# Altium PCB FMC_SDR.PcbDoc
Units mm, origin at the board's own origin, x right, y up, seen from the top; angles counter-clockwise.
Board outline 138.92 x 69 mm, 6 copper layers (Top Layer, Plane L2 GND, L3 VADJ,signals, L4 5P0V, 3P3V, 3P3VAUX, signals, Plane L5 GND, Bottom Layer), stack 1.46 mm thick; 44 components, 76 nets, 214 pads, 124 vias.
Unrouted connection lines stored in the file: 46.
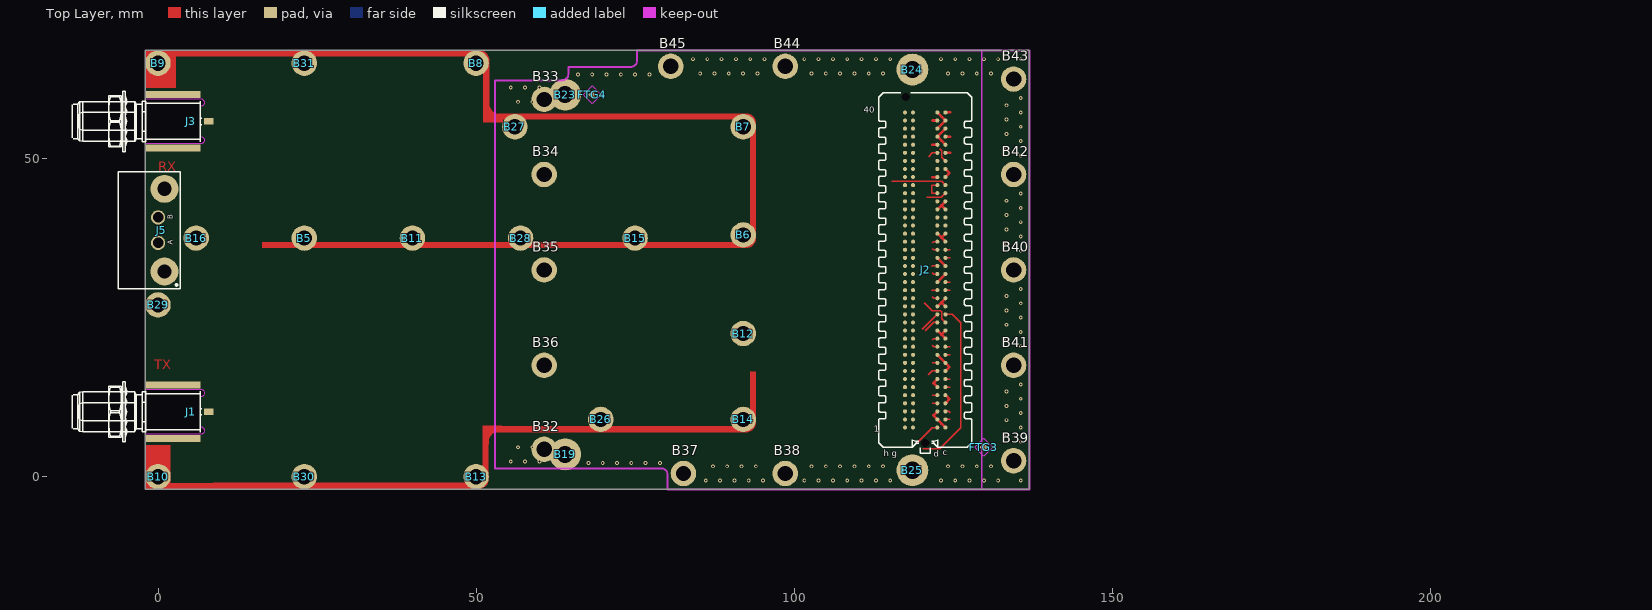
[diagram p0: Top Layer view]
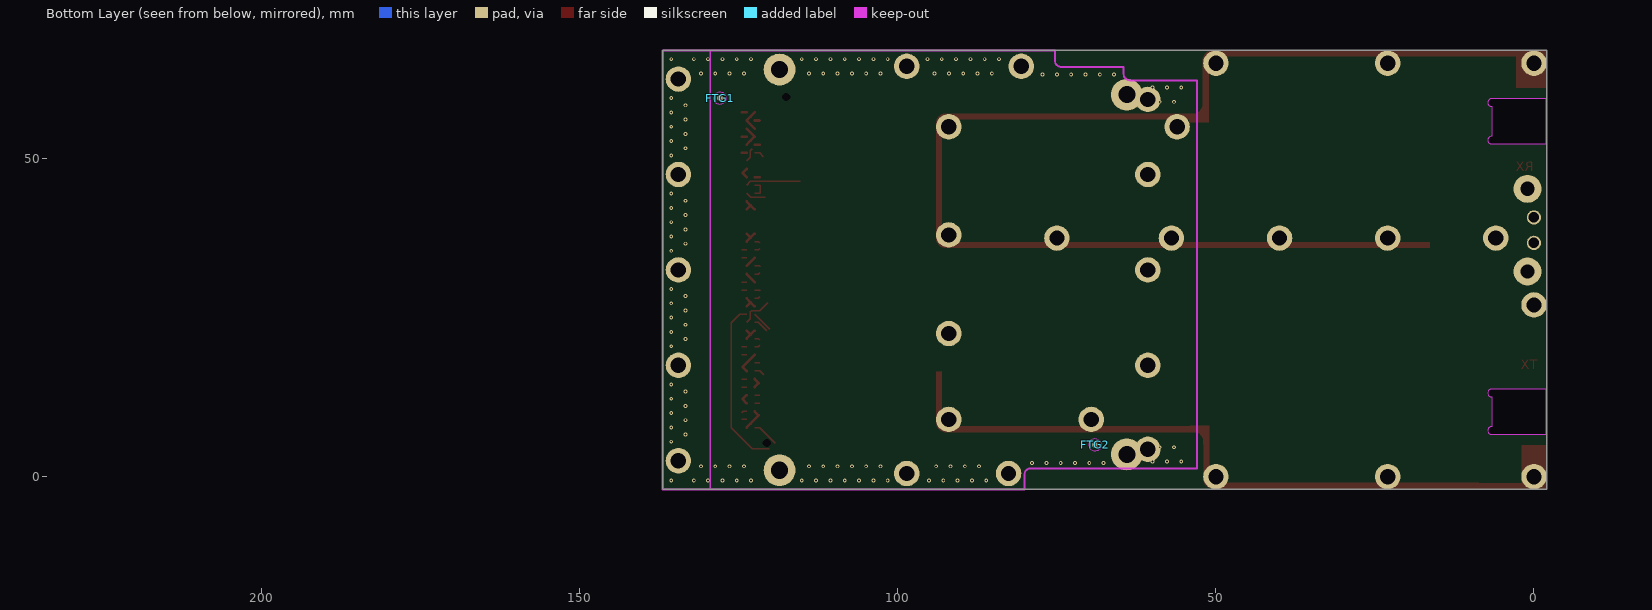
[diagram p1: Bottom Layer view, seen from below]
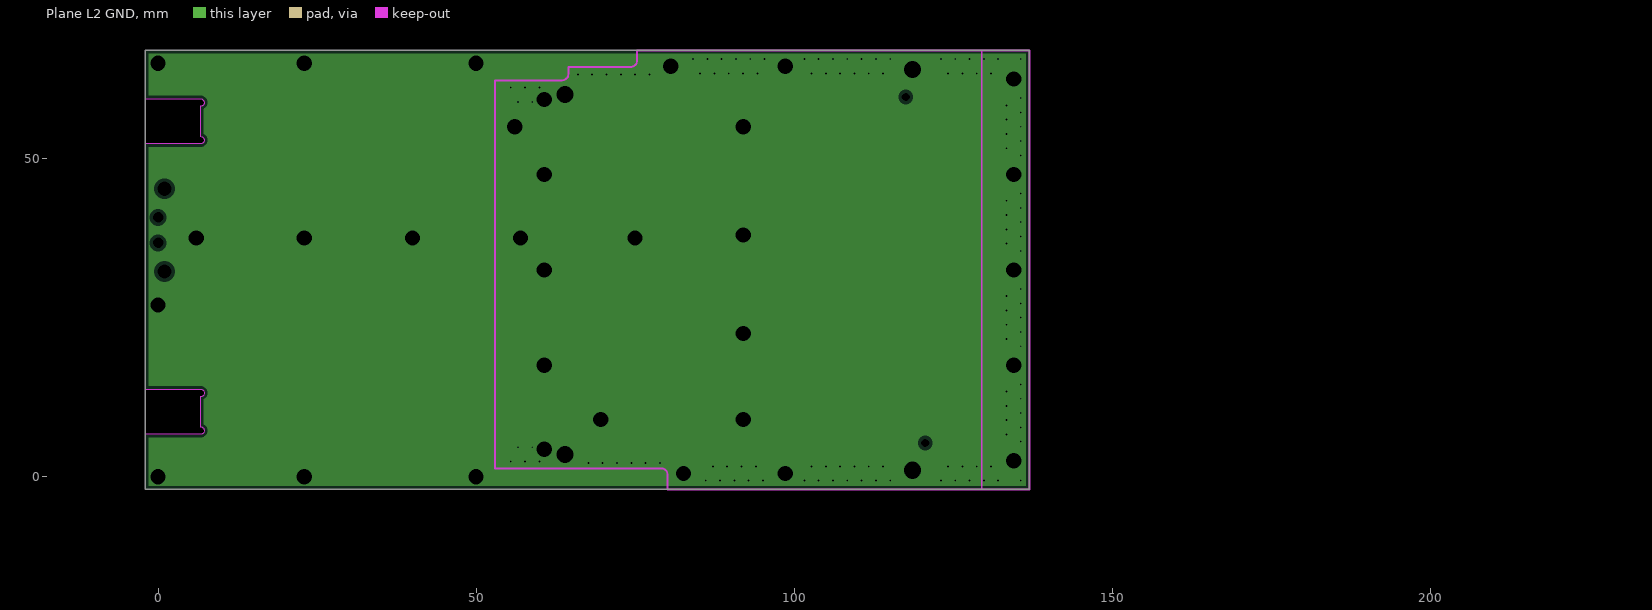
[diagram p2: Plane L2 GND, clearances drawn from the general rule]
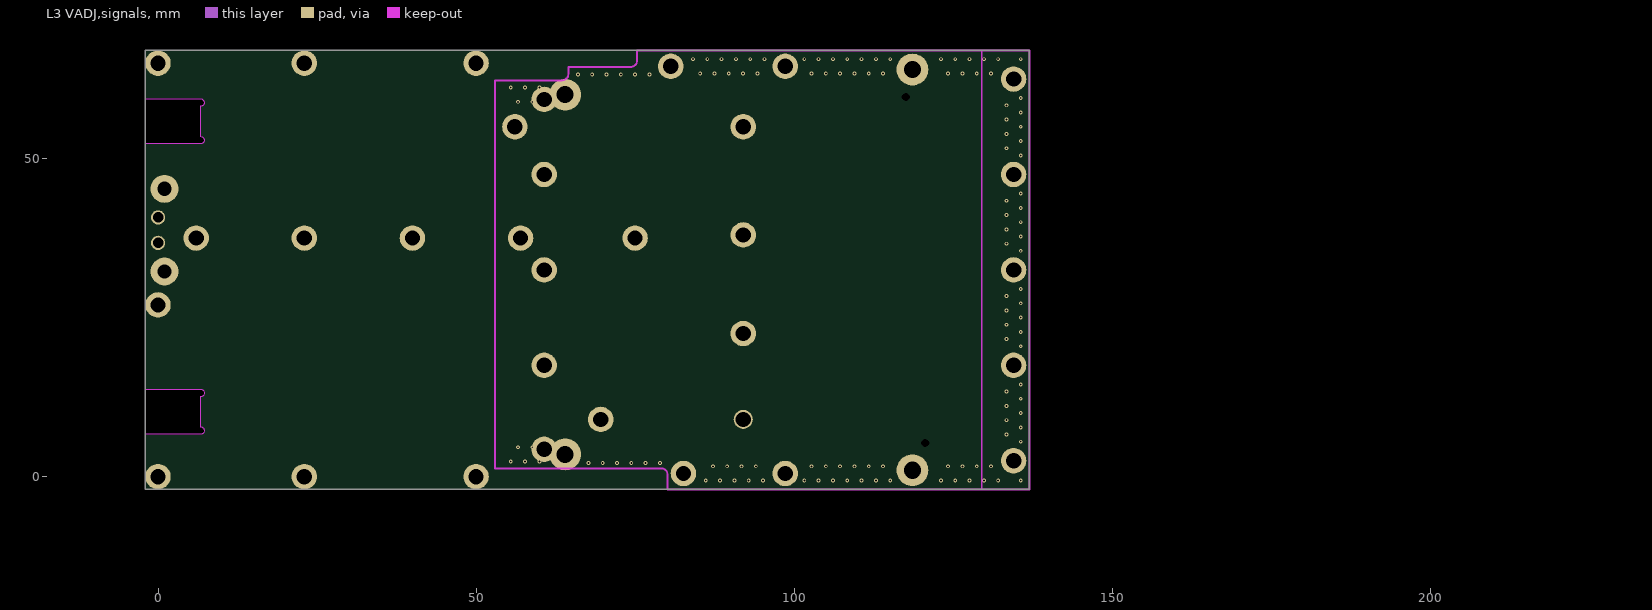
[diagram p3: L3 VADJ,signals]
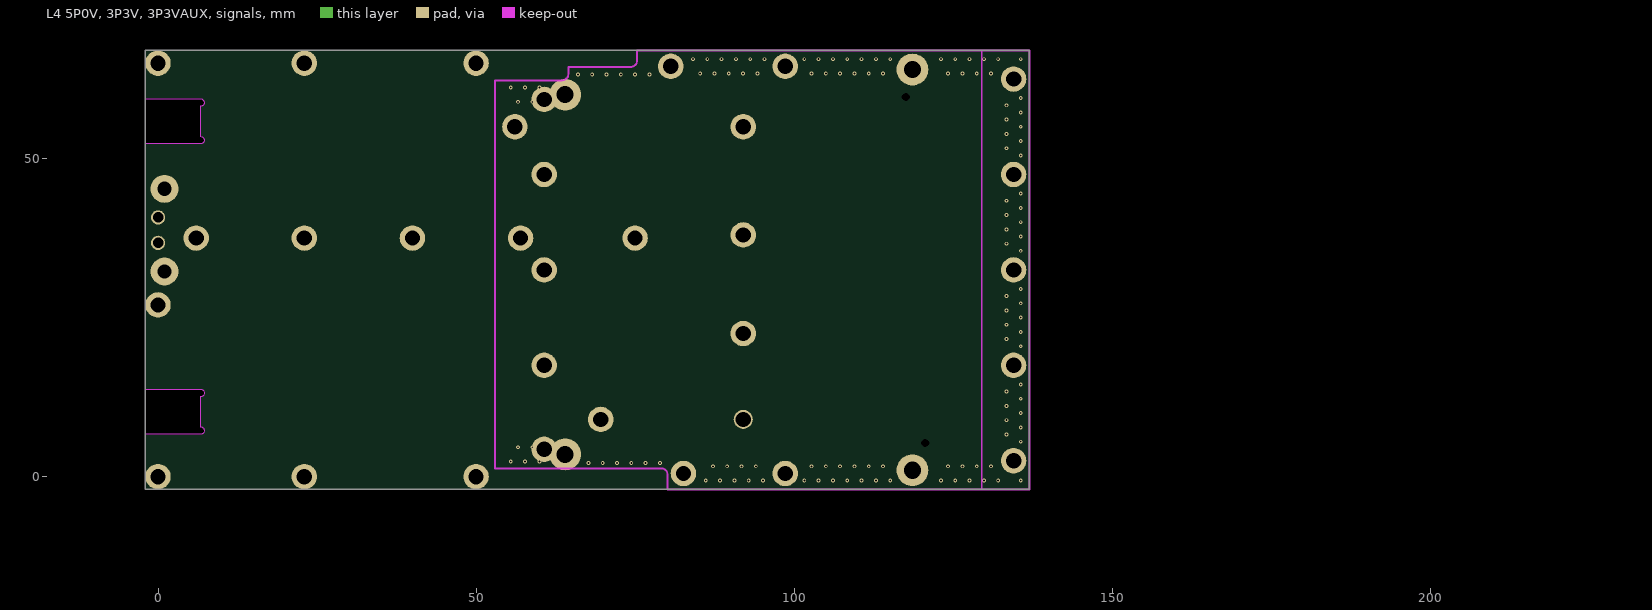
[diagram p4: L4 5P0V, 3P3V, 3P3VAUX, signals]
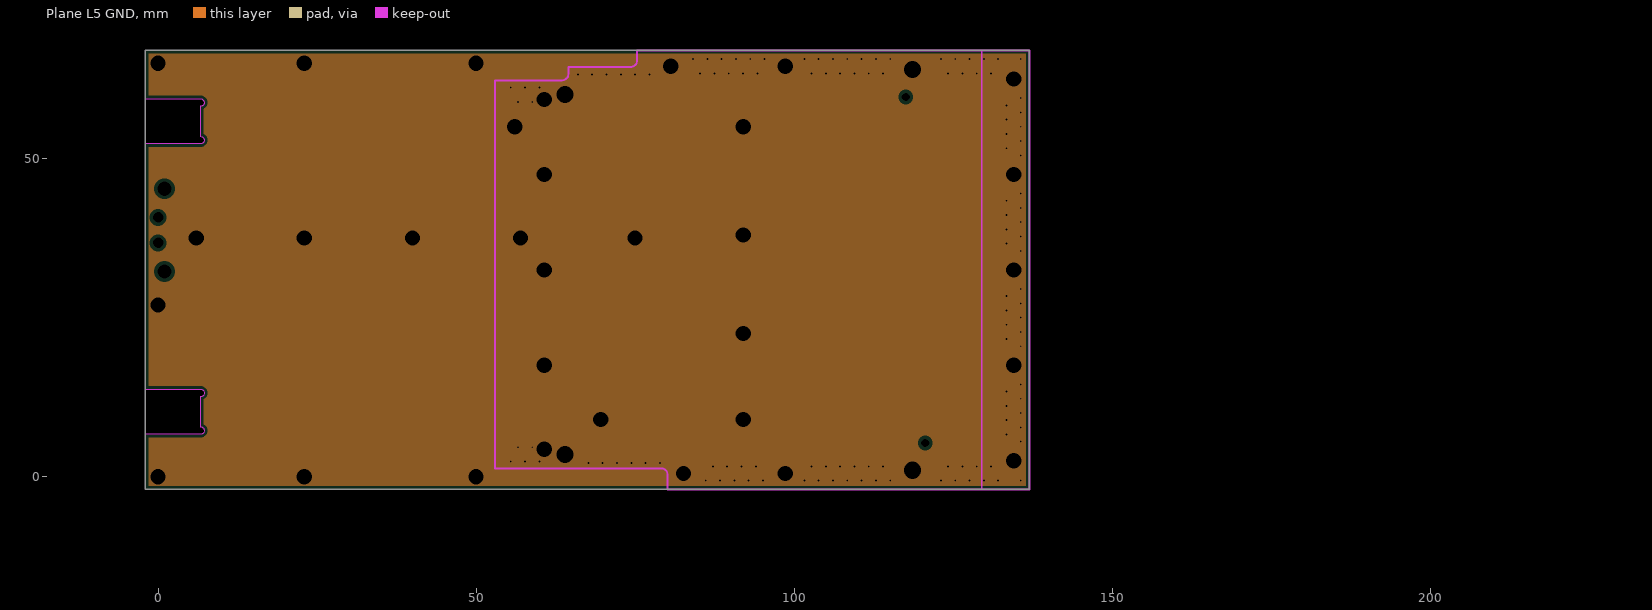
[diagram p5: Plane L5 GND, clearances drawn from the general rule]
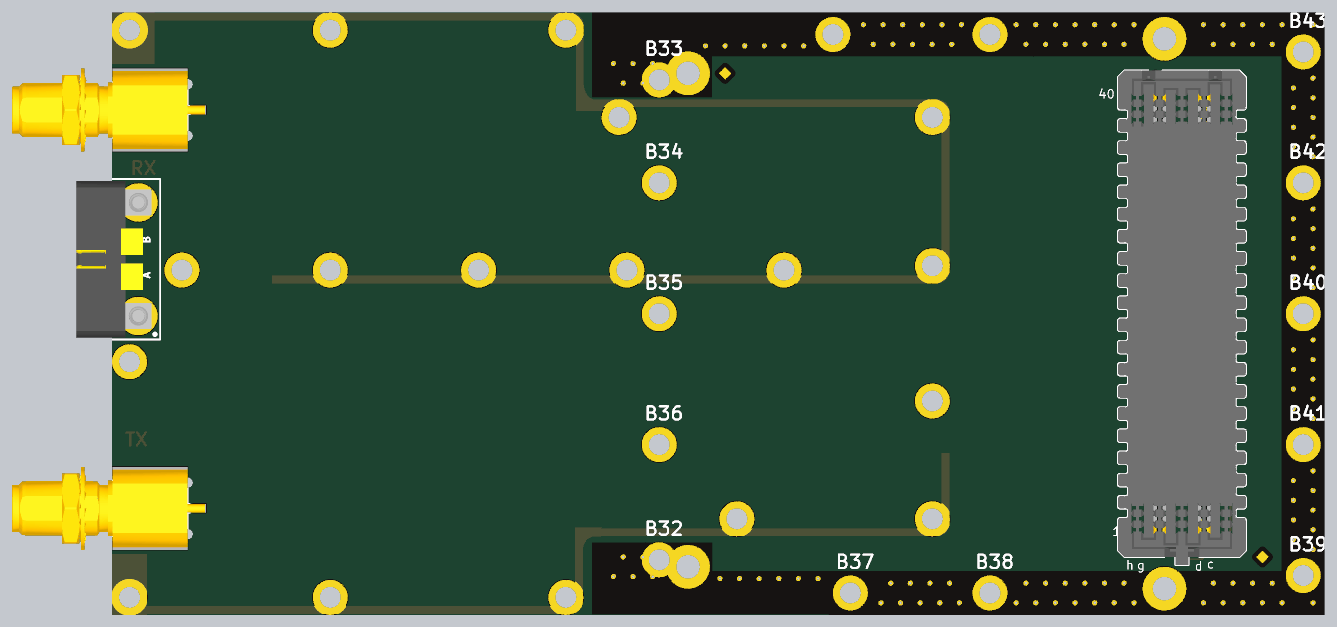
[diagram p6: 3D render of the assembled board from above, using the file's embedded part models]

## Layer stack, top to bottom
Top Solder: solder mask 0.0762, Solder Resist, Dk 3.5
Top Layer: signal copper 0.035
Dielectric1: core 0.15, FR-4, Dk 4.8
Plane L2 GND: plane copper 0.035, net GND
Dielectric4: prepreg 0.3, FR-4, Dk 4.8
L3 VADJ,signals: signal copper 0.035
Dielectric2: core 0.15, FR-4, Dk 4.8
L4 5P0V, 3P3V, 3P3VAUX, signals: signal copper 0.035
Dielectric3: prepreg 0.5, FR-4, Dk 4.8
Plane L5 GND: plane copper 0.035, net GND
Dielectric5: core 0.15, FR-4, Dk 4.8
Bottom Layer: signal copper 0.035
Bottom Solder: solder mask 0.0762, Solder Resist, Dk 3.5

## Board outline
-2,-2 -2,67 136.925,67 136.925,-2 80.1,-2

## Design rules (kind name [scope] priority, off if disabled: settings)
Clearance Clearance_trou [InPadClass('No_DRC')] p1: gap=0.254 ignorepadtopadclearanceinfootprint=FALSE except(0: Arc-Hole Track-Hole SMDPad-Hole THPad-Hole Via-Hole Fill-Hole Poly-Hole Region-Hole Text-Hole)
Clearance [All] p2: gap=0.173 ignorepadtopadclearanceinfootprint=FALSE except(0: Arc-Hole Track-Hole SMDPad-Hole THPad-Hole Via-Hole Fill-Hole Poly-Hole Region-Hole Text-Hole)
ComponentClearance No_DRC [InComponentClass('NO-DRC')] p1: gap=0 collisioncheckmode=3 verticalgap=0 showdistances=FALSE
ComponentClearance [All] p2: gap=0.254 collisioncheckmode=3 verticalgap=0 showdistances=FALSE
DiffPairsRouting [All] p1: maxlimit=0.356 minlimit=0.224 mostfreqgap=0.254 toplayer_minwidth=0.381 toplayer_maxwidth=0.381 toplayer_prefwidth=0.381 midlayer1_minwidth=0.381 midlayer1_maxwidth=0.381 midlayer1_prefwidth=0.381 midlayer2_minwidth=0.381 midlayer2_maxwidth=0.381 midlayer2_prefwidth=0.381 bottomlayer_minwidth=0.381 bottomlayer_maxwidth=0.381 bottomlayer_prefwidth=0.381 maxuncoupledlength=12.7
FabricationTestPointUsage TestPointUsage [All] p1: valid=0 allowmultiple=FALSE
FabricationTestpoint Testpoint [All] p1: side=3 testpointundercomponent=TRUE minsize=1.016 maxsize=2.54 preferedsize=1.524 minholesize=0 maxholesize=1.016 preferedholesize=0.813 testpointgrid=0.025 allowsidetop=TRUE allowsidebottom=TRUE usegrid=TRUE gridtolerance=0
HoleSize [All] p1: absolutevalues=TRUE maxlimit=25.4 minlimit=0.025 maxpercent=80.000 minpercent=20.000
MinimumSolderMaskSliver [All] p1: minsoldermaskwidth=0.025
PlaneClearance [All] p1: clearance=0.508
PlaneConnect Vias_Plane [IsVia] p1: planeconnectstyle=Direct reliefexpansion=0.508 reliefentries=4 reliefconductorwidth=0.254 reliefairgap=0.254
PlaneConnect [All] p2: planeconnectstyle=Relief reliefexpansion=0.508 reliefentries=4 reliefconductorwidth=0.762 reliefairgap=0.254
PolygonConnect Direc [InPadClass(Direc)] p1: connectstyle=Direct reliefconductorwidth=0.254 reliefentries=4 polygonreliefangle="90 Angle" airgapwidth=0.254
PolygonConnect Vias [IsVia] p2: connectstyle=Direct reliefconductorwidth=0.254 reliefentries=4 polygonreliefangle="90 Angle" airgapwidth=0.254
PolygonConnect [All] p3: connectstyle=Relief reliefconductorwidth=0.406 reliefentries=4 polygonreliefangle="90 Angle" airgapwidth=0.254
RoomDefinition FMC_SDR_top [InComponentClass('FMC_SDR_top')] p1: confinementstyle=ConfineIn formatcopy=TRUE lockcomponents=FALSE outline 76.775,81 137.775,81 137.775,89 76.775,89
RoomDefinition power_supplies [InComponentClass('power_supplies')] p2: confinementstyle=ConfineIn formatcopy=TRUE lockcomponents=FALSE outline -14.8,-69.8 36,-69.8 36,-44.4 -14.8,-44.4
RoomDefinition ipmi [InComponentClass('ipmi')] p3: confinementstyle=ConfineIn formatcopy=TRUE lockcomponents=FALSE outline -14.8,-69.8 36,-69.8 36,-44.4 -14.8,-44.4
RoomDefinition fmc_connector [InComponentClass('fmc_connector')] p4: confinementstyle=ConfineIn formatcopy=TRUE lockcomponents=FALSE outline -14.8,-69.8 36,-69.8 36,-44.4 -14.8,-44.4
RoutingVias [All] p1: holewidth=0.3 width=0.6 viastyle="Through Hole" minholewidth=0.3 minwidth=0.6 maxholewidth=0.4 maxwidth=0.8
ShortCircuit SMA_1 [InPadClass('SMA')] p1: allowed=TRUE
ShortCircuit [All] p2: allowed=FALSE
SilkToSilkClearance [All] p1: silktosilkclearance=0.051
SilkToSolderMaskClearance SilkscreenOverComponentPads [IsPad] p1: minsilkscreentomaskgap=0.051 clearancetoexposedcopper=TRUE
SolderMaskExpansion [All] p1: expansion=0.102
Width Width_Pair_Diff [(InDifferentialPairClass('All Differential Pairs'))] p1: maxlimit=0.423 minlimit=0.169 preferedwidth=0.423 toplayer_maxwidth=0.224 toplayer_prefwidth=0.224 midlayer1_minwidth=0.305 midlayer2_minwidth=0.305 bottomlayer_maxwidth=0.224 bottomlayer_prefwidth=0.224 impedancedriven=TRUE minimp=50.000000 maximp=58.000000 favimp=50.000000
Width [All] p2: maxlimit=1.016 minlimit=0.168 preferedwidth=0.224
19 further rules are at their usual default settings.

## Classes and differential pairs
component class FMC_SDR_top: B5 B6 B7 B8 B9 B10 B11 B12 B13 B14 B15 B16 B19 B23 B24 B25 B26 B27 B28 B29 B30 B31 B32 B33 B34 B35 B36 B37 B38 B39 B40 B41 B42 B43 B44 B45 J1 J3 J5
component class fmc_connector: FTG1 FTG2 FTG3 FTG4 J2
differential pair CLK0_M2C: +CLK0_M2C_P -CLK0_M2C_N
differential pair CLK1_M2C: +CLK1_M2C_P -CLK1_M2C_N
differential pair DP0_C2M: +DP0_C2M_P -DP0_C2M_N
differential pair DP0_M2C: +DP0_M2C_P -DP0_M2C_N
differential pair GBTCLK0_M2C: +GBTCLK0_M2C_P -GBTCLK0_M2C_N
differential pair LA00_CC: +LA00_CC_P -LA00_CC_N
differential pair LA01_CC: +LA01_CC_P -LA01_CC_N
differential pair LA02: +LA02_P -LA02_N
differential pair LA03: +LA03_P -LA03_N
differential pair LA04: +LA04_P -LA04_N
differential pair LA05: +LA05_P -LA05_N
differential pair LA06: +LA06_P -LA06_N
differential pair LA07: +LA07_P -LA07_N
differential pair LA08: +LA08_P -LA08_N
differential pair LA09: +LA09_P -LA09_N
differential pair LA10: +LA10_P -LA10_N
differential pair LA11: +LA11_P -LA11_N
differential pair LA12: +LA12_P -LA12_N
differential pair LA13: +LA13_P -LA13_N
differential pair LA14: +LA14_P -LA14_N
differential pair LA15: +LA15_P -LA15_N
differential pair LA16: +LA16_P -LA16_N
differential pair LA17_CC: +LA17_CC_P -LA17_CC_N
differential pair LA18_CC: +LA18_CC_P -LA18_CC_N
differential pair LA19: +LA19_P -LA19_N
differential pair LA20: +LA20_P -LA20_N
differential pair LA21: +LA21_P -LA21_N
differential pair LA22: +LA22_P -LA22_N
differential pair LA23: +LA23_P -LA23_N

## Components (designator, comment, footprint, x,y, rotation, side; value= is the part's Value field where it differs from the comment)
B5 "Plated Hole" MTG240_400#1 23,37.5 r0 top
B6 "Plated Hole" MTG240_400#1 92,38 r0 top
B7 "Plated Hole" MTG240_400#1 92,55 r0 top
B8 "Plated Hole" MTG240_400#1 50,65 r0 top
B9 "Plated Hole" MTG240_400#1 0,65 r0 top
B10 "Plated Hole" MTG240_400#1 0,0 r0 top
B11 "Plated Hole" MTG240_400#1 40,37.5 r0 top
B12 "Plated Hole" MTG240_400#1 92,22.5 r0 top
B13 "Plated Hole" MTG240_400#1 50,0 r0 top
B14 "Plated Hole" MTG240_400#2 92,9 r0 top
B15 "Plated Hole" MTG240_400#1 75,37.5 r0 top
B16 "Plated Hole" MTG240_400#1 6,37.5 r0 top
B19 "Plated Hole" MTG270_500 64,3.5 r0 top
B23 "Plated Hole" MTG270_500 64,60.05 r0 top
B24 "Plated Hole" MTG270_500 118.6,64 r0 top
B25 "Plated Hole" MTG270_500 118.6,1 r0 top
B26 "Plated Hole" MTG240_400#1 69.6,9 r0 top
B27 "Plated Hole" MTG240_400#1 56.1,55 r0 top
B28 "Plated Hole" MTG240_400#1 57,37.5 r0 top
B29 "Plated Hole" MTG240_400#1 0,27 r0 top
B30 "Plated Hole" MTG240_400#1 23,0 r0 top
B31 "Plated Hole" MTG240_400#1 23,65 r0 top
B32 "Plated Hole" MTG240_400#1 60.7,4.3 r0 top
B33 "Plated Hole" MTG240_400#1 60.7,59.3 r0 top
B34 "Plated Hole" MTG240_400#1 60.7,47.5 r0 top
B35 "Plated Hole" MTG240_400#1 60.7,32.5 r0 top
B36 "Plated Hole" MTG240_400#1 60.7,17.5 r0 top
B37 "Plated Hole" MTG240_400#1 82.6,0.5 r0 top
B38 "Plated Hole" MTG240_400#1 98.6,0.5 r0 top
B39 "Plated Hole" MTG240_400#1 134.5,2.5 r0 top
B40 "Plated Hole" MTG240_400#1 134.5,32.5 r0 top
B41 "Plated Hole" MTG240_400#1 134.5,17.5 r0 top
B42 "Plated Hole" MTG240_400#1 134.5,47.5 r0 top
B43 "Plated Hole" MTG240_400#1 134.5,62.5 r0 top
B44 "Plated Hole" MTG240_400#1 98.6,64.5 r0 top
B45 "Plated Hole" MTG240_400#1 80.6,64.5 r0 top
FTG1 "Use only in PCB" FIDUCIAL_TOP_C100-200 127.94,59.5 r90 bottom
FTG2 "Use only in PCB" FIDUCIAL_TOP_C100-200 69,5 r90 bottom
FTG3 "Use only in PCB" FIDUCIAL_TOP_S100-200 129.825,4.625 r90 top
FTG4 "Use only in PCB" FIDUCIAL_TOP_S100-200 68.25,60.05 r90 top
J1 "SMA" TELEGARTNER_J01151A0451 8,10.2 r180 top locked
J2 "VITA 57" SAMTEC_ASP-127797-01 120.6,32.491 r270 top
J3 "SMA" TELEGARTNER_J01151A0451 8,55.85 r180 top locked
J5 "M80-5000000M5-02-333-00-000" M80-5000000M5-02-333-00-000 1.014,38.746 r90 top locked

## Footprints (in the part's own frame and the unit in brackets; to place one, negate y for a bottom-side part, rotate by r counter-clockwise, add the part's x,y. Pads: shape width x height; smd on the part's side, far side on the other; paste and mask are expansions set on the pad)
FIDUCIAL_TOP_C100-200 [mm] "Round Fiducial Target, Top Layer, 1.0mm, Top Solder 2.0mm, Keepout =2.0mm"
  round 1 smd paste-0.51 mask+0.5: FTG2(0,0)
  Top Layer keep-out circle w0.1: c0,0 r1
FIDUCIAL_TOP_S100-200 [mm] "Square Fiducial Target, Top Layer, 1.0mm, Top Solder 2.0mm, Keepout =2.0mm"
  rect 1x1 smd rot 45 paste-0.51 mask+0.5: 1(0,0)
  Top Layer keep-out region: 1.414,0 0,-1.414 -1.414,0 0,1.414
M80-5000000M5-02-333-00-000 [mm] "2pin (2 power), THT socket with M2 jackscrews (H=6.05mm, W=18mm, D=8.6mm)"
  round 2.25 hole 1.65: A(-2,1) B(2,1)
  round 4.4 hole 2.25: M1(-6.5,0) M2(6.5,0)
  silkscreen extent -9.2,-2.5 9.2,7.3, body extent -9,-2 9,7.1, height 6.08
MTG240_400#1 [mm] "Plated Through Hole: Hole Dia.=2.4mm Pad Dia.=4.0mm"
  round 4 hole 2.4: 1(0,0)
MTG240_400#2 [mm] "Plated Through Hole: Hole Dia.=2.4mm Pad Dia.=4.0mm"
  round 4 / inner round 3 / far side round 4 hole 2.4: 1(0,0)
MTG270_500 [mm] "Plated Through Hole: Hole Dia.=2.7mm Pad Dia.=5.0mm"
  round 5 hole 2.7: 1(0,0)
SAMTEC_ASP-127797-01 [mm] "Connector VITA 57, 160 Male contacts in 4 row cdgh"
  round 1 hole 1.3 unplated mask+0.3: 1(-27.191,-3.048) 2(27.191,0)
  round 0.64 smd: c1(24.765,3.175) c2(23.495,3.175) c3(22.225,3.175) c4(20.955,3.175) c5(19.685,3.175) c6(18.415,3.175) c7(17.145,3.175) c8(15.875,3.175) c9(14.605,3.175) c10(13.335,3.175) c11(12.065,3.175) c12(10.795,3.175) c13(9.525,3.175) c14(8.255,3.175) c15(6.985,3.175) c16(5.715,3.175) c17(4.445,3.175) c18(3.175,3.175) c19(1.905,3.175) c20(0.635,3.175) c21(-0.635,3.175) c22(-1.905,3.175) c23(-3.175,3.175) c24(-4.445,3.175) c25(-5.715,3.175) c26(-6.985,3.175) c27(-8.255,3.175) c28(-9.525,3.175) c29(-10.795,3.175) c30(-12.065,3.175) c31(-13.335,3.175) c32(-14.605,3.175) c33(-15.875,3.175) c34(-17.145,3.175) c35(-18.415,3.175) c36(-19.685,3.175) c37(-20.955,3.175) c38(-22.225,3.175) c39(-23.495,3.175) c40(-24.765,3.175) d1(24.765,1.905) d2(23.495,1.905) d3(22.225,1.905) d4(20.955,1.905) d5(19.685,1.905) d6(18.415,1.905) d7(17.145,1.905) d8(15.875,1.905) d9(14.605,1.905) d10(13.335,1.905) d11(12.065,1.905) d12(10.795,1.905) d13(9.525,1.905) d14(8.255,1.905) d15(6.985,1.905) d16(5.715,1.905) d17(4.445,1.905) d18(3.175,1.905) d19(1.905,1.905) d20(0.635,1.905) d21(-0.635,1.905) d22(-1.905,1.905) d23(-3.175,1.905) d24(-4.445,1.905) d25(-5.715,1.905) d26(-6.985,1.905) d27(-8.255,1.905) d28(-9.525,1.905) d29(-10.795,1.905) d30(-12.065,1.905) d31(-13.335,1.905) d32(-14.605,1.905) d33(-15.875,1.905) d34(-17.145,1.905) d35(-18.415,1.905) d36(-19.685,1.905) d37(-20.955,1.905) d38(-22.225,1.905) d39(-23.495,1.905) d40(-24.765,1.905) g1(24.765,-1.905) g2(23.495,-1.905) g3(22.225,-1.905) g4(20.955,-1.905) g5(19.685,-1.905) g6(18.415,-1.905) g7(17.145,-1.905) g8(15.875,-1.905) g9(14.605,-1.905) g10(13.335,-1.905) g11(12.065,-1.905) g12(10.795,-1.905) g13(9.525,-1.905) g14(8.255,-1.905) g15(6.985,-1.905) g16(5.715,-1.905) g17(4.445,-1.905) g18(3.175,-1.905) g19(1.905,-1.905) g20(0.635,-1.905) g21(-0.635,-1.905) g22(-1.905,-1.905) g23(-3.175,-1.905) g24(-4.445,-1.905) g25(-5.715,-1.905) g26(-6.985,-1.905) g27(-8.255,-1.905) g28(-9.525,-1.905) g29(-10.795,-1.905) g30(-12.065,-1.905) g31(-13.335,-1.905) g32(-14.605,-1.905) g33(-15.875,-1.905) g34(-17.145,-1.905) g35(-18.415,-1.905) g36(-19.685,-1.905) g37(-20.955,-1.905) g38(-22.225,-1.905) g39(-23.495,-1.905) g40(-24.765,-1.905) h1(24.765,-3.175) h2(23.495,-3.175) h3(22.225,-3.175) h4(20.955,-3.175) h5(19.685,-3.175) h6(18.415,-3.175) h7(17.145,-3.175) h8(15.875,-3.175) h9(14.605,-3.175) h10(13.335,-3.175) h11(12.065,-3.175) h12(10.795,-3.175) h13(9.525,-3.175) h14(8.255,-3.175) h15(6.985,-3.175) h16(5.715,-3.175) h17(4.445,-3.175) h18(3.175,-3.175) h19(1.905,-3.175) h20(0.635,-3.175) h21(-0.635,-3.175) h22(-1.905,-3.175) h23(-3.175,-3.175) h24(-4.445,-3.175) h25(-5.715,-3.175) h26(-6.985,-3.175) h27(-8.255,-3.175) h28(-9.525,-3.175) h29(-10.795,-3.175) h30(-12.065,-3.175) h31(-13.335,-3.175) h32(-14.605,-3.175) h33(-15.875,-3.175) h34(-17.145,-3.175) h35(-18.415,-3.175) h36(-19.685,-3.175) h37(-20.955,-3.175) h38(-22.225,-3.175) h39(-23.495,-3.175) h40(-24.765,-3.175)
  silkscreen extent -27.89,-7.34 28.78,7.34, body extent -27.89,-7.34 28.78,7.34, height 5.61
TELEGARTNER_J01151A0451 [mm] "SMA 50 ohm Edge Mount Bulkhead Jack Receptacle"
  rect 1.5x1 smd: 1(0,0)
  rect 8.6x1.1 smd: 2(5.65,4.2) 2(5.65,-4.2)
  Keep-Out Layer board cut-out: 1.35,-3.55 1.09,-3.491 0.881,-3.324 0.765,-3.084 0.765,-2.816 0.881,-2.576 1.09,-2.409 1.35,-2.35 1.35,-2.35 1.35,2.35 1.09,2.409 0.881,2.576 0.765,2.816 0.765,3.084 0.881,3.324 1.09,3.491 1.35,3.55 1.35,3.55 9.95,3.55 9.95,-3.55
  silkscreen extent 1.1,-4.75 21.45,4.75, body extent -0.65,-4.75 21.45,4.75, height 5.25

## Part data
B5 B6 B7 B8 B9 B10 B11 B12 B13 B14 B15 B16 B26 B27 B28 B29 B30 B31 B32 B33 B34 B35 B36 B37 B38 B39 B40 B41 B42 B43 B44 B45: library part PLATED_HOLE2.4_PAD4.0, "Single Terminal Socket", Author="CERN DEM JMW", ComponentHeight=0mm, Component Type="Standard (No BOM)", CreateDate=2011-10-10, Family="Plated Hole", LatestRevisionDate=2011-10-10, Mounted=No, PackageDescription="Plated Through Hole: Hole Dia.=2.4mm Pad Dia.=4.0mm", Part Description="Plated Through Hole: Hole Dia.=2.4mm Pad Dia.=4.0mm", Part Number=PLATED_HOLE2.4_PAD4.0, Pin Count=1, SMD=No, Socket=No, Status=None, Table=Pads
B19 B23 B24 B25: library part PLATED_HOLE2.7_PAD5.0, "Single Terminal Socket", Author="CERN DEM JMW", ComponentHeight=0mm, Component Type="Standard (No BOM)", CreateDate=27/09/2011, Family="Plated Hole", HelpURL=Undefined, LatestRevisionDate=27/09/2011, Mounted=No, PackageDescription="Plated Through Hole: Hole Dia.=2.7mm Pad Dia.=5.0mm", Part Description="Plated Through Hole: Hole Dia.=2.7mm Pad Dia.=5.0mm", Part Number=PLATED_HOLE2.7_PAD5.0, Pin Count=1, Sense=No, SMD=No, Socket=No, Status=None
FTG1 FTG2: library part FIDUCIAL_TARGET_C100-200, "Fiducial Target", Author="CERN DEM JLC", ComponentHeight=0mm, Component Type="Standard (No BOM)", CreateDate=09/02/2010, Family=Fiducial, HelpURL=Undefined, LatestRevisionDate=04/04/2012, Mounted=No, PackageDescription="Round Fiducial Target, Top Layer, 1.0mm, Top Solder 2.0mm, Keepout =2.0mm", Part Description="Round Fiducial Target, Top Layer, 1.0mm, Top Solder 2.0mm, Keepout =2.0mm", Part Number=FIDUCIAL_TARGET_C100-200, Pin Count=1, Sense=No, SMD=Yes, Socket=No, Status=None
FTG3 FTG4: library part FIDUCIAL_TARGET_S100-200, "Fiducial Target", Author="CERN DEM JLC", ComponentHeight=0mm, Component Type="Standard (No BOM)", CreateDate=09/02/2010, Family=Fiducial, HelpURL=Undefined, LatestRevisionDate=04/04/2012, Mounted=No, PackageDescription="Square Fiducial Target, Top Layer, 1.0mm, Top Solder 2.0mm, Keepout =2.0mm", Part Description="Square Fiducial Target, Top Layer, 1.0mm, Top Solder 2.0mm, Keepout =2.0mm", Part Number=FIDUCIAL_TARGET_S100-200, Pin Count=1, Sense=No, SMD=Yes, Socket=No, Status=None
J1 J3: library part TELEGARTNER_J01151A0451, Manufacturer=TELEGARTNER, Manufacturer Part Number=J01151A0451, Author="CERN DEM JLC", ComponentHeight=7mm, Component Type=Standard, CreateDate=27/10/2016, Family=SMA, HelpURL=\\cern.ch\dfs\Applications\Altium\Datasheets\TELEGARTNER_J01151A0451.pdf, LatestRevisionDate=27/10/2016, Mounted=Yes, Part Description="SMA 50 ohms Edge Mount Bulkhead Jack Receptacle", Part Number=TELEGARTNER_J01151A0451, Pin Count=2, PressFit=No, Sense=No, SMD=No, Socket=No, Status=None
J2: library part SAMTEC_ASP-127797-01, "Connector VITA 57, 160 Male contacts in 4 row cdgh", Manufacturer=SAMTEC, Manufacturer Part Number=ASP-134488-01, Author="CERN DEM JLC", ComponentHeight=6.1mm, Component Type=Standard, CreateDate=9/24/2009, Datasheet=\\cern.ch\dfs\Applications\Altium\Datasheets\SAMTEC_ASP-127797-01.pdf, Family="VITA 57", HelpURL=\\cern.ch\dfs\Applications\Altium\Datasheets\SAMTEC_ASP-127797-01.pdf, LatestRevisionDate=9/24/2009, Mounted=Yes, Part Description="160 contacts (4 rows cdgh) Surface Mount Male Connector, VITA 57", Part Number=SAMTEC_ASP-127797-01, Pin Count=160, SMD=Yes, Socket=No, Status=None, Table=SAMTEC
J5: library part CON_M80-5000000M5-02-333-00-000, "2pin (2 power), THT socket with M2 jackscrews", Manufacturer=Harwin, Part Number=M80-5L10405M5-02-333-00-000, Bonding=No, Case=M80-5000000M5-02-333-00-000, ComponentHeigth=6.05mm, Component Type=Standard, CreateDate=2018-06-18, Device=M80-5000000M5-02-333-00-000, HelpURL=https://www.harwin.com/products/M80-5000000M5-02-333-00-000/, LatestRevisionDate=2018-06-18, Manufacturer Part Number=M80-5000000M5-02-333-00-000, Mounted=Yes, PackageDescription="H=6.05mm, W=18mm, D=8.6mm", Part Description="2pin (2 power), THT socket with M2 jackscrews", Pin Count=6, PressFit=No, Sense=No, SMD=No, Socket=No

## Free pads (board coordinates)
  round 3.5 on Mech9: 1(51,-11.5) 1(228,-11.5)

## Via types
v1: diameter 0.6, hole 0.3, Top Layer to Bottom Layer, 124 vias

## Nets (pads, with @x,y where several pads share a name; then routed paths per layer and width w, separated by ;. In a path a pad name is that pad's centre, name@x,y a point inside that pad or via, vN(x,y) a via of type N, cw(c..) or ccw(c..) an arc to the next point about the centre after c; other vN are vias at no path point)
3P3V: J2.c39 J2.d36 J2.d38 J2.d40 | length 4.4
  Top Layer w0.406: 121.743,52.176 J2.d36 ; J2.d38 123.14,55.351 J2.c39 123.14,56.621 J2.d40
3P3VAUX: J2.d32 | length 0.8
  Top Layer w0.406: 121.743,47.096 J2.d32
5P0V: 
12P0V: J2.c35 J2.c37 | length 1.5
  Top Layer w0.406: J2.c35 124.537,50.906 ; J2.c37 124.537,53.446
CLK0_M2C_N: J2.h5
CLK0_M2C_P: J2.h4
CLK1_M2C_N: J2.g3
CLK1_M2C_P: J2.g2
DP0_C2M_N: J2.c3 | length 0.8
  Top Layer w0.224: J2.c3 124.336,10.266 124.519,10.083
DP0_C2M_P: J2.c2 | length 0.8
  Top Layer w0.224: J2.c2 123.78,8.991 124.533,8.991 124.537,8.995
DP0_M2C_N: J2.c7 | length 0.8
  Top Layer w0.224: J2.c7 124.537,15.346
DP0_M2C_P: J2.c6 | length 0.8
  Top Layer w0.224: J2.c6 124.537,14.076
GA0: J2.c34 | length 2.3
  Top Layer w0.224: 122.893,51.536 123.171,51.259 123.171,50.24 J2.c34
GA1: J2.d35 | length 1.6
  Top Layer w0.224: 121.128,50.291 121.743,50.906 J2.d35
GBTCLK0_M2C_N: J2.d5 | length 0.8
  Top Layer w0.224: 121.743,12.806 J2.d5
GBTCLK0_M2C_P: J2.d4 | length 0.8
  Top Layer w0.224: 121.743,11.536 J2.d4
GND: B5.1 B6.1 B7.1 B8.1 B9.1 B10.1 B11.1 B12.1 B13.1 B14.1 B15.1 B16.1 B19.1 B23.1 B24.1 B25.1 B26.1 B27.1 B28.1 B29.1 B30.1 B31.1 B32.1 B33.1 B34.1 B35.1 B36.1 B37.1 B38.1 B39.1 B40.1 B41.1 B42.1 B43.1 B44.1 B45.1 J2.c1 J2.c4 J2.c5 J2.c8 J2.c9 J2.c12 J2.c13 J2.c16 J2.c17 J2.c20 J2.c21 J2.c24 J2.c25 J2.c28 J2.c29 J2.c32 J2.c33 J2.c36 J2.c38 J2.c40 J2.d2 J2.d3 J2.d6 J2.d7 J2.d10 J2.d13 J2.d16 J2.d19 J2.d22 J2.d25 J2.d28 J2.d37 J2.d39 J2.g1 J2.g4 J2.g5 J2.g8 J2.g11 J2.g14 J2.g17 J2.g20 J2.g23 J2.g26 J2.g29 J2.g32 J2.g35 J2.g38 J2.g40 J2.h2 J2.h3 J2.h6 J2.h9 J2.h12 J2.h15 J2.h18 J2.h21 J2.h24 J2.h27 J2.h30 J2.h33 J2.h36 J2.h39 | length 32.1
  Top Layer w0.406: 121.743,55.986 J2.d39 ; J2.d3 121.87,9.631 J2.d2 123.14,8.361 J2.c1 ; J2.d6 121.87,14.711 J2.d7 ; J2.d10 123.14,18.521 J2.c9 124.41,17.251 J2.c8 ; J2.d13 123.14,22.331 ; J2.d16 123.14,27.411 ; J2.d19 123.14,31.221 J2.c20 ; J2.d22 123.14,33.761 J2.c21 ; J2.d25 123.14,37.571 ; J2.d28 123.14,42.651 ; J2.c4 124.41,12.171 J2.c5 ; J2.c12 123.14,22.331 ; J2.c13 123.14,22.331 ; J2.c16 123.14,27.411 ; J2.c17 123.14,27.411 ; J2.c24 123.14,37.571 ; J2.c25 123.14,37.571 ; J2.c28 123.14,42.651 ; J2.c29 123.14,42.651 ; J2.c32 124.41,47.731 J2.c33 ; J2.c36 123.14,52.811 J2.d37 123.14,54.081 J2.c38 ; J2.c40 124.537,57.256
  other v1: 86.1,-0.625 88.35,-0.625 90.6,-0.625 92.85,-0.625 95.1,-0.625 101.6,-0.625 103.85,-0.625 106.1,-0.625 108.35,-0.625 110.6,-0.625 112.85,-0.625 115.1,-0.625 123.075,-0.625 125.325,-0.625 127.575,-0.625 129.825,-0.625 132.075,-0.625 135.625,-0.625 87.225,1.625 89.475,1.625 91.725,1.625 93.975,1.625 102.725,1.625 104.975,1.625 107.225,1.625 109.475,1.625 111.725,1.625 113.975,1.625 124.2,1.625 126.45,1.625 128.7,1.625 130.95,1.625 67.65,2.15 69.9,2.15 72.15,2.15 74.4,2.15 76.65,2.15 78.9,2.15 55.45,2.375 57.7,2.375 59.95,2.375 56.575,4.625 58.825,4.625 135.625,5.5 133.375,6.625 135.625,7.75 133.375,8.875 135.625,10 133.375,11.125 135.625,12.25 133.375,13.375 135.625,14.5 135.625,20.5 133.375,21.625 135.625,22.75 133.375,23.875 135.625,25 133.375,26.125 135.625,27.25 133.375,28.375 135.625,29.5 135.625,35.5 133.375,36.625 135.625,37.75 133.375,38.875 135.625,40 133.375,41.125 135.625,42.25 133.375,43.375 135.625,44.5 135.625,50.5 133.375,51.625 135.625,52.75 133.375,53.875 135.625,55 133.375,56.125 135.625,57.25 133.375,58.375 56.575,58.925 58.825,58.925 135.625,59.5 55.45,61.175 57.7,61.175 59.95,61.175 66,63.2 68.25,63.2 70.5,63.2 72.75,63.2 75,63.2 77.25,63.2 85.225,63.375 87.475,63.375 89.725,63.375 91.975,63.375 94.225,63.375 102.725,63.375 104.975,63.375 107.225,63.375 109.475,63.375 111.725,63.375 113.975,63.375 124.2,63.375 126.45,63.375 128.7,63.375 130.95,63.375 84.1,65.625 86.35,65.625 88.6,65.625 90.85,65.625 93.1,65.625 95.35,65.625 101.6,65.625 103.85,65.625 106.1,65.625 108.35,65.625 110.6,65.625 112.85,65.625 115.1,65.625 123.075,65.625 125.325,65.625 127.575,65.625 129.825,65.625 132.075,65.625 135.625,65.625
LA00_CC_N: J2.h20
LA00_CC_P: J2.h19
LA01_CC_N: J2.h17
LA01_CC_P: J2.h16
LA02_N: J2.g16
LA02_P: J2.g15
LA03_N: J2.h14
LA03_P: J2.h13
LA04_N: J2.g13
LA04_P: J2.g12
LA05_N: J2.h11
LA05_P: J2.h10
LA06_N: J2.h8
LA06_P: J2.h7
LA07_N: J2.g7
LA07_P: J2.g6
LA08_N: J2.d15 | length 3.3
  Top Layer w0.224: 120.168,23.172 122.502,25.506 J2.d15
LA08_P: J2.d14 | length 2.4
  Top Layer w0.224: 120.646,22.974 121.908,24.236 J2.d14
LA09_N: J2.g10
LA09_P: J2.g9
LA10_N: J2.c15 | length 26.8
  Top Layer w0.224: 120.213,4.366 122.865,4.366 126.17,7.67 126.17,24.18 124.844,25.506 J2.c15
LA10_P: J2.c14 | length 5.2
  Top Layer w0.224: 120.455,27.355 121.7,26.11 122.97,26.11 123.171,25.909 123.171,24.84 J2.c14
LA11_N: J2.d9 | length 0.8
  Top Layer w0.224: 121.743,17.886 J2.d9
LA11_P: J2.d8 | length 1.7
  Top Layer w0.224: 121.109,15.981 121.743,16.616 J2.d8
LA12_N: J2.c11 | length 0.8
  Top Layer w0.224: J2.c11 124.537,20.426
LA12_P: J2.c10 | length 0.8
  Top Layer w0.224: J2.c10 124.537,19.156
LA13_N: J2.d12 | length 0.9
  Top Layer w0.224: 121.725,21.513 121.908,21.696 J2.d12
LA13_P: J2.d11 | length 0.9
  Top Layer w0.224: 121.725,20.624 121.923,20.426 J2.d11
LA14_N: J2.d18 | length 0.9
  Top Layer w0.224: 121.613,29.186 121.743,29.316 J2.d18
LA14_P: J2.d17 | length 0.9
  Top Layer w0.224: 121.725,28.244 121.923,28.046 J2.d17
LA15_N: J2.g19
LA15_P: J2.g18
LA16_N: J2.c19 | length 0.8
  Top Layer w0.224: J2.c19 124.537,30.586
LA16_P: J2.c18 | length 0.8
  Top Layer w0.224: J2.c18 124.537,29.316
LA17_CC_N: J2.d21 | length 0.9
  Top Layer w0.224: 121.606,33.004 121.728,33.126 J2.d21
LA17_CC_P: J2.d20 | length 0.9
  Top Layer w0.224: 121.725,32.054 121.923,31.856 J2.d20
LA18_CC_N: J2.g22
LA18_CC_P: J2.g21
LA19_N: J2.h23
LA19_P: J2.h22
LA20_N: J2.c23 | length 0.8
  Top Layer w0.224: J2.c23 124.537,35.666
LA20_P: J2.c22 | length 0.8
  Top Layer w0.224: J2.c22 124.537,34.396
LA21_N: J2.h26
LA21_P: J2.h25
LA22_N: J2.g25
LA22_P: J2.g24
LA23_N: J2.d24 | length 0.9
  Top Layer w0.224: 121.725,36.753 121.908,36.936 J2.d24
LA23_P: J2.d23 | length 0.9
  Top Layer w0.224: 121.725,35.864 121.923,35.666 J2.d23
NetC1_1: 
NetC1_2: 
NetIC1_4: 
NetIC7_2: 
NetJ2_d30: J2.d30 J2.d31 | length 3
  Top Layer w0.224: J2.d30 121.616,44.556 121.616,45.826 J2.d31
NetLD2_1: 
NetLD3_2: 
PG_C2M: J2.d1 | length 4.3
  Top Layer w0.224: 119.235,5.257 121.704,7.726 J2.d1
SCL: J2.c30 | length 3.2
  Top Layer w0.224: 120.823,43.951 123.109,43.951 123.714,44.556 J2.c30
SDA: J2.c31 | length 8.7
  Top Layer w0.224: 115.35,46.43 123.171,46.43 J2.c31
VADJ: J2.g39 J2.h40
pads on no net: FTG1.FTG2 FTG2.FTG2 FTG3.1 FTG4.1 J1.1 J1.2 J2.1 J2.2 J2.c26 J2.c27 J2.d26 J2.d27 J2.d29 J2.d33 J2.d34 J2.g27 J2.g28 J2.g30 J2.g31 J2.g33 J2.g34 J2.g36 J2.g37 J2.h1 J2.h28 J2.h29 J2.h31 J2.h32 J2.h34 J2.h35 J2.h37 J2.h38 J3.1 J3.2 J5.A J5.B J5.M1 J5.M2

## Polygon pours and split planes (outlines as drawn)
GND on Plane L2 GND (split plane): 184 vertices, not listed, extent -1.489,-1.489 136.414,66.489
GND on Plane L5 GND (split plane): 184 vertices, not listed, extent -1.489,-1.489 136.414,66.489

## Keep-outs
Keep-Out Layer:
  lines w0.254: 62.289,1.3 53,1.3 53,62.3 62.416,62.3 ; 64.5,62.788 64.5,64.4 74.3,64.4 ccw(c74.3,65.4) 75.3,65.4 75.3,67 117.026,67 ; 65.591,1.3 79.1,1.3 cw(c79.1,0.3) 80.1,0.3 80.1,-2 116.899,-2 ; 120.074,67 129.5,67 129.5,-2 120.201,-2
  lines w0.3: 75.3,67 75.3,65.4 cw(c74.3,65.4) 74.3,64.4 64.5,64.4 64.5,63.3 cw(c63.5,63.3) 63.5,62.3 53,62.3 53,1.3 79.1,1.3 cw(c79.1,0.3) 80.1,0.3 80.1,-2 137,-2 137,67 75.3,67 ; 75.3,67 75.3,67

## Other copper
Top Layer:
  rectangle net GND: -2,-2 2,4.985
  rectangle net GND: -2,61.094 2.863,67
  region net GND: 8.926,-1.009 0.475,-1.009 cw(c0.475,0.617) -0.675,-0.533 cw(c0.306,0.448) -1.082,0.448 -1.082,4.942 -1.982,4.94 -1.982,-0.465 ccw(c-0.556,-0.465) -1.564,-1.473 ccw(c-0.522,-0.43) -0.522,-1.905 8.924,-1.905
  region net GND: 51.044,8 54.066,8 54.066,6.992 53.36,6.992 ccw(c53.36,5.691) 52.441,6.611 ccw(c53.606,5.446) 51.958,5.445 51.958,5.061 51.044,5.061
  region net GND: 51.051,7.652 51.051,0.573 cw(c49.425,0.573) 50.575,-0.578 cw(c49.594,0.404) 49.594,-0.984 8.704,-0.984 8.705,-1.884 50.507,-1.884 ccw(c50.507,-0.458) 51.515,-1.467 ccw(c50.472,-0.424) 51.947,-0.424 51.947,7.639 51.059,7.641
  region net GND: 52.054,58.765 ccw(c54.017,58.765) 52.629,57.377 52.664,57.342 ccw(c53.339,58.017) 53.339,57.063 54.188,57.063 54.188,55.717 51.165,55.717 51.165,58.765
  region net GND: 52.998,56.173 91.507,56.173 cw(c91.507,54.546) 92.657,55.696 cw(c91.676,54.715) 93.063,54.715 93.063,37.078 93.963,37.08 93.963,55.628 ccw(c92.538,55.628) 93.546,56.636 ccw(c92.503,55.594) 92.503,57.068 53,57.068
  region net GND: 2.836,66.085 49.591,66.085 cw(c49.591,64.458) 50.742,65.608 cw(c49.761,64.627) 51.148,64.627 51.148,58.45 52.048,58.451 52.048,65.54 ccw(c50.622,65.54) 51.631,66.548 ccw(c50.588,65.506) 50.588,66.98 2.838,66.98
  region net GND: 93.065,16.542 93.065,9.463 cw(c91.438,9.463) 92.588,8.312 cw(c91.607,9.294) 91.607,7.906 53.433,7.906 53.435,7.006 92.52,7.006 ccw(c92.52,8.432) 93.528,7.423 ccw(c92.486,8.466) 93.96,8.466 93.96,16.529 93.072,16.531
  region net GND: 93.065,45.515 93.065,38.436 cw(c91.438,38.436) 92.588,37.285 cw(c91.607,38.267) 91.607,36.879 16.348,36.879 16.35,35.979 92.52,35.979 ccw(c92.52,37.405) 93.528,36.396 ccw(c92.486,37.439) 93.96,37.439 93.96,45.502 93.072,45.504
  text "RX" at 0,48 h1.5
  text "TX" at -0.616,16.9 h1.5
  text ".Layer_Name" at 149.665,-35.51 h1.91 r45
  text "1" at 149.665,-39.955 h2.54
L3 VADJ,signals:
  text ".Layer_Name" at 161.095,-34.875 h1.91 r45
  text "3" at 159.825,-39.955 h2.54
L4 5P0V, 3P3V, 3P3VAUX, signals:
  text "4" at 164.27,-39.955 h2.54
Bottom Layer:
  text ".Layer_Name" at 189.035,-22.81 h1.91 r45
  text "6" at 175.065,-39.955 h2.54
Plane L2 GND (plane layer: these items are gaps in the copper):
  rectangle: 157.92,-41.225 178.24,-36.145
  rectangle: 147.76,-41.225 152.84,-36.145
  text ".Layer_Name" at 168.715,-22.81 h1.91 r45
  text "2" at 154.745,-39.955 h2.54
Plane L5 GND (plane layer: these items are gaps in the copper):
  rectangle: 173.16,-41.225 178.24,-36.145
  rectangle: 147.76,-41.225 168.08,-36.145
  text ".Layer_Name" at 170.62,-35.51 h1.91 r45
  text "5" at 169.985,-39.955 h2.54

## Silkscreen, mask and mechanical layers (free items; w line width, h text height)
Top Overlay:
  text ".Layer_Name" at 104.16,-33.39 h1.91
Bottom Overlay:
  text ".Layer_Name" at 142.26,-33.39 h1.91
Top Paste:
  text ".Layer_Name" at 104.16,-38.47 h1.91
Bottom Paste:
  text ".Layer_Name" at 142.26,-38.47 h1.91
Top Solder:
  rectangle: 53,-1.947 66.8,6.3
  rectangle: 53,57.3 66.75,67
  rectangle: 53,-1.947 80.475,3
  rectangle: 64.5,62 75.55,67
  rectangle: 75.3,62 137,67
  rectangle: 80.1,-2 137,3
  rectangle: 132,-2 137,67
  region: 53.272,57.708 53.272,62.153 63.813,62.153 63.813,57.708
  region: 53.272,1.447 53.272,5.765 63.813,5.765 63.813,1.447
  text ".Layer_Name" at 104.16,-35.93 h1.91
Bottom Solder:
  text ".Layer_Name" at 142.26,-35.93 h1.91
Mechanical 1:
  lines w0.1: 75.3,67 75.3,67 ; 75.3,67 -2,67 -2,-2 80.1,-2 137,-2 137,67 75.3,67
  lines w0.15: 137,-2 137,67
Mechanical 2:
  circle w0.1: c64.003,60.046 r1.025
  circle w0.1: c64.003,3.496 r1.025
  lines w0.1: 52.003,5.746 64.003,5.746 cw(c64.003,3.496) 64.003,1.246 53.003,1.246 53.003,2.546 51.553,2.546 ; 52.003,5.771 52.003,57.771 ; 52.003,57.796 64.003,57.796 ccw(c64.003,60.046) 64.003,62.296 53.003,62.296 53.003,60.996 51.553,60.996 ; 63.003,3.496 65.003,3.496 ; 63.003,60.046 65.003,60.046 ; 63.5,62.3 53,62.3 53,1.3 79.1,1.3 ; 64.003,2.496 64.003,4.496 ; 64.003,59.046 64.003,61.046 ; 64.5,63.3 64.5,64.4 74.3,64.4 ; 75.3,65.4 75.3,67 ; 80.1,-2 80.1,0.3 ; 94,5.025 94,58.925 ; 49.953,2.546 cw(c50.753,2.546) 51.553,2.546 ; 49.953,2.546 49.953,60.996 ; 49.953,2.546 49.503,2.546 49.503,60.996 49.953,60.996 ; 49.953,60.996 ccw(c50.753,60.996) 51.553,60.996 ; 51.553,2.546 51.553,60.996
  lines w0.635: 63.5,62.3 ccw(c63.5,63.3) 64.5,63.3 ; 74.3,64.4 ccw(c74.3,65.4) 75.3,65.4 ; 79.1,1.3 cw(c79.1,0.3) 80.1,0.3
Mechanical 5:
  lines w0.254: 87.65,-71.49 107.97,-71.49 ; 152.84,-41.225 152.84,-36.145 ; 157.92,-41.225 157.92,-36.145 ; 163,-41.225 163,-36.145 ; 168.08,-41.225 168.08,-36.145 ; 173.16,-41.225 173.16,-36.145 ; 147.76,-41.225 178.24,-41.225 178.24,-36.145 147.76,-36.145 147.76,-41.225
Title Block:
  circle w0.305: c47.645,-33.39 r3.81
  lines w0.254: 45.74,-34.652 ccw(c50.185,-34.66) 46.453,-32.245 ; 54.63,-34.66 54.63,-30.215 ; 57.17,-37.835 99.08,-37.835 ; 57.17,-34.66 99.08,-34.66 ; 57.17,-31.485 99.08,-31.485 ; 71.14,-41.01 71.14,-28.31 ; 43.2,-41.01 55.9,-41.01 55.9,-28.31 43.2,-28.31 43.2,-41.01 ; 57.17,-41.01 99.08,-41.01 99.08,-28.31 57.17,-28.31 57.17,-41.01
  lines w0.305: 44.089,-34.761 45.105,-37.835 ; 47.137,-40.883 50.21,-36.209 ; 47.645,-29.58 55.265,-28.945 ; 51.379,-32.628 53.995,-41.01
  text "Number" at 58.44,-30.85 h1.91
  text "EDA-02064-V1" at 72.41,-30.85 h1.91
  text "Drawn By" at 58.44,-34.025 h1.91
  text "CEGELEC NL" at 72.41,-34.025 h1.91
  text "CERN" at 44.47,-34.279 h2.54
  text "DATE" at 58.44,-37.2 h1.91
  text "07-12-2009" at 72.41,-37.2 h1.91
  text "MOD." at 58.44,-40.375 h1.91
  text "-" at 72.41,-40.375 h1.91
  text "Print Date" at 58.44,-43.55 h1.27
  text ".Print_Date" at 73.68,-43.55 h1.27
  text ".Print_Time" at 86.38,-43.55 h1.27
  text ".Print_Scale" at 33.04,-71.49 h1.27
Mechanical 8:
  circle w0.1: c64,60.05 r1.35
  circle w0.1: c64,3.5 r1.35
  circle w0.1: c118.6,64 r1.35
  circle w0.1: c120.6,5.3 r0.65
  circle w0.1: c118.6,1 r1.35
  circle w0.1: c117.55,59.7 r0.65
  circle w0.1: c118.6,64 r2.9
  circle w0.1: c118.6,1 r2.9
  lines w0.1: 50,-11.5 51,-11.5 ; 51,-12.5 51,-11.5 ; 51,-10.5 51,-11.5 ; 52,-11.5 51,-11.5 ; 53,6.8 84,6.8 84,56.8 53,56.8 ; 60,-11.5 61,-11.5 ; 61,-12.5 61,-11.5 ; 61,-10.5 61,-11.5 ; 62,-11.5 61,-11.5 ; 63,3.5 64,3.5 ; 63,60.05 64,60.05 ; 64,2.5 64,3.5 ; 64,4.5 64,3.5 ; 64,59.05 64,60.05 ; 64,61.05 64,60.05 ; 65,3.5 64,3.5 ; 65,60.05 64,60.05 ; 116.55,59.7 117.55,59.7 ; 117.55,58.7 117.55,59.7 ; 117.55,60.7 117.55,59.7 ; 117.6,1 118.6,1 ; 117.6,64 118.6,64 ; 118.55,59.7 117.55,59.7 ; 118.6,0 118.6,1 ; 118.6,2 118.6,1 ; 118.6,63 118.6,64 ; 118.6,65 118.6,64 ; 119.6,1 118.6,1 ; 119.6,5.3 120.6,5.3 ; 119.6,64 118.6,64 ; 120.6,4.3 120.6,5.3 ; 120.6,6.3 120.6,5.3 ; 121.6,5.3 120.6,5.3 ; 125.3,7.7 126.3,7.7 ; 126.3,6.7 126.3,7.7 ; 126.3,8.7 126.3,7.7 ; 127.3,7.7 126.3,7.7 ; 217,248.5 218,248.5 ; 218,247.5 218,248.5 ; 218,249.5 218,248.5 ; 219,248.5 218,248.5
Mechanical 9:
  drawing of 514 lines, arcs and shapes, not listed
  text "OPTICAL TARGET 2x2mm" at 235.895,190.085 h2.5 r90
  text "ALL DIMENSIONS ARE IN MILLIMETERS" at 235.895,101.085 h2.5 r90
  text "Ø3.5 ±0.005" at 232.5,-1 h2 r90
  text "NOT PLATED HOLE" at 235,-1 h2 r90
Mechanical 10:
  lines w0.1: 48,-2 53,-2 53,-7 ; 48,62.3 53,62.3 53,67.3 ; 50.5,1.3 53,1.3 53,-1.2 ; 62,64.4 64.5,64.4 64.5,66.9 ; 72.8,67 75.3,67 75.3,69.5 ; 77.6,-2 80.1,-2 80.1,-4.5 ; 129.5,72 129.5,67 134.5,67 ; 134.5,-2 129.5,-2 ; 129.5,-2 129.5,-7 129.5,-2
Mechanical 14:
  lines w0.3: 75.3,67 75.3,65.4 cw(c74.3,65.4) 74.3,64.4 64.5,64.4 64.5,63.3 cw(c63.5,63.3) 63.5,62.3 53,62.3 53,1.3 79.1,1.3 cw(c79.1,0.3) 80.1,0.3 80.1,-2 137,-2 137,67 75.3,67 ; 75.3,67 75.3,67
  text "All dimensions are in mm." at 101,72.575 h1.52
Drill Drawing:
  lines w0.1: 62.5,63.3 63.5,63.3 ; 63.5,62.3 63.5,63.3 ; 63.5,64.3 63.5,63.3 ; 64.5,63.3 63.5,63.3 ; 73.3,65.4 74.3,65.4 ; 74.3,64.4 74.3,65.4 ; 74.3,66.4 74.3,65.4 ; 75.3,65.4 74.3,65.4 ; 78.1,0.3 79.1,0.3 ; 79.1,-0.7 79.1,0.3 ; 79.1,1.3 79.1,0.3 ; 80.1,0.3 79.1,0.3
  lines w0.254: 120.355,82.375 122.26,82.375 ; 120.355,85.55 122.26,85.55 ; 120.355,88.725 122.26,88.725
  text "LAYER 4" at 84.795,85.55 h1.27
  text "PWR Signals" at 101.94,85.55 h1.27
  text "LAYER 5" at 84.795,82.375 h1.27
  text "GND PLANE" at 101.94,82.375 h1.27
  text "Components" at 189.885,-30.215 h1.91
  text ".Component_Count" at 207.665,-30.215 h1.91
  text "Pins" at 189.885,-32.755 h1.91
  text ".Pad_Count" at 207.665,-32.755 h1.91
  text "Vias" at 189.885,-35.295 h1.91
  text ".Via_Count" at 207.665,-35.295 h1.91
  text "Holes" at 189.885,-37.835 h1.91
  text ".Hole_Count" at 207.665,-37.835 h1.91
  text "Nets" at 189.885,-40.375 h1.91
  text ".Net_Count" at 207.665,-40.375 h1.91

## Dimensions
75.3,67 to 137,67 on Mechanical 14
75.3,67 to 64.5,64.4 on Mechanical 14
53,62.3 to 64.5,64.4 on Mechanical 14
103.4,68 to 104.6,68 on Mechanical 9
36,-19 to 51,-11.5 on Mechanical 9
36,-19 to 51,-11.5 on Mechanical 9
137,67 to 137,-2 on Drill Drawing

## Text inside footprints (layer, text, board x,y; h text height)
J1: Drill Drawing "r0.6" at 5.464,7.967 h1 r180; Drill Drawing "8.6" at 3.238,11.809 h1 r180; Drill Drawing "7.1" at 0.111,10.444 h1 r270; Mechanical 8 "2.5mm" at 0,8.95 h1 r180; Mechanical 8 "3mm" at -5.05,8.925 h1 r180
J2: Top Overlay "1" at 112.527,7.074 h1; Top Overlay "40" at 110.93,57.2 h1; Top Overlay "g" at 115.375,3.225 h1; Top Overlay "h" at 114.105,3.225 h1; Top Overlay "c" at 123.376,3.352 h1; Top Overlay "d" at 121.979,3.098 h1; Mechanical 14 "1" at 112.527,7.074 h1; Mechanical 14 "40" at 113.488,59.796 h1 r270; Mechanical 14 "g" at 118.369,2.629 h1; Mechanical 14 "h" at 117.044,2.519 h1; Mechanical 14 "d" at 122.145,2.502 h1; Mechanical 14 "c" at 123.521,2.519 h1
J3: Drill Drawing "r0.6" at 5.464,53.617 h1 r180; Drill Drawing "8.6" at 3.238,57.459 h1 r180; Drill Drawing "7.1" at 0.111,56.094 h1 r270; Mechanical 8 "2.5mm" at 0,54.6 h1 r180; Mechanical 8 "3mm" at -5.05,54.575 h1 r180
J5: Top Overlay "B" at 2.314,40.446 h0.8 r90; Top Overlay "A" at 2.314,36.446 h0.8 r90